# Altium PCB PCB1.PcbDoc
Units mm, origin at the board's own origin, x right, y up, seen from the top; angles counter-clockwise.
Board outline 100.25 x 54.84 mm, 2 copper layers (Top Layer, Bottom Layer); 13 components, 21 nets, 65 pads, 11 vias.
Unrouted connection lines stored in the file: 22.
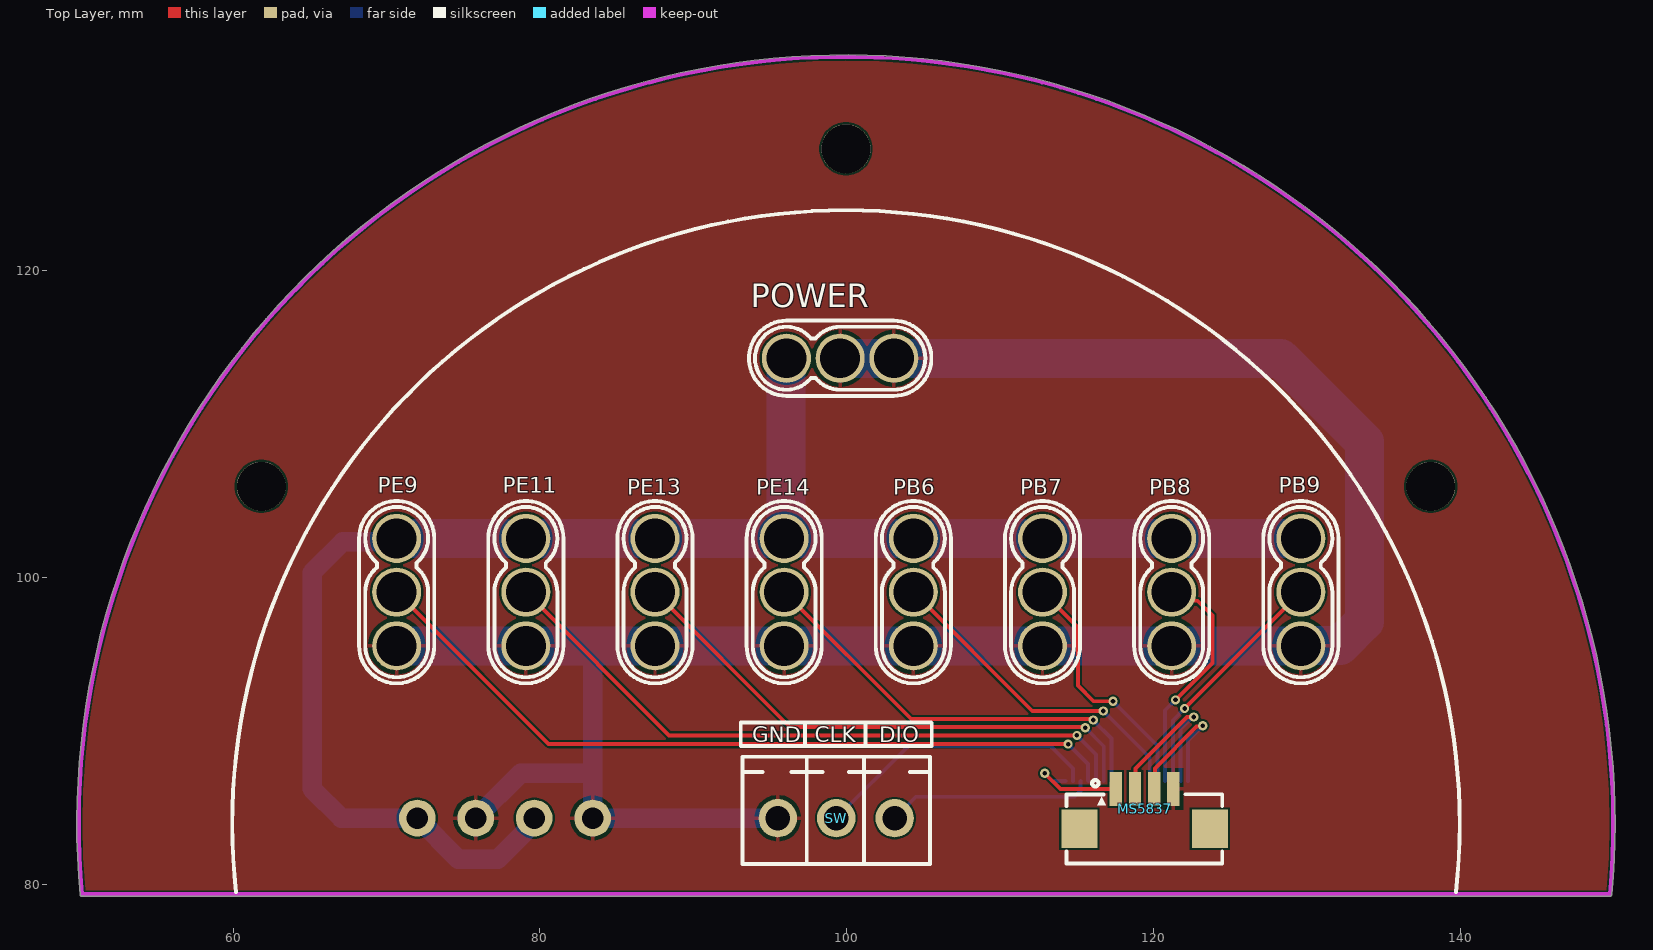
[diagram p0: Top Layer view]
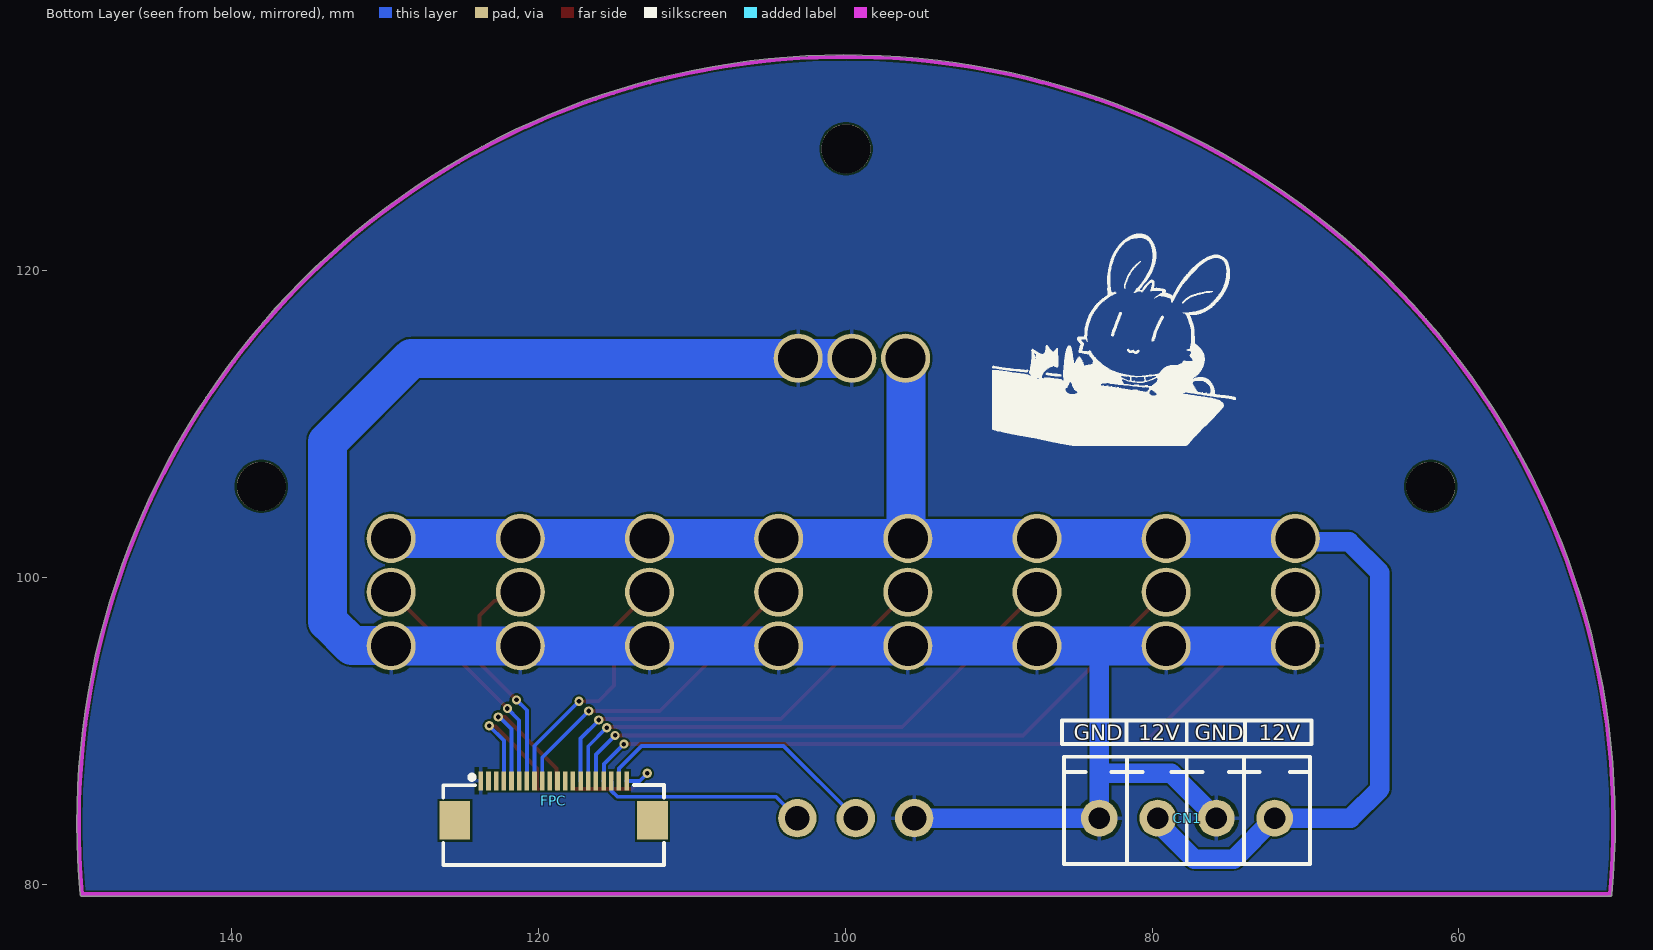
[diagram p1: Bottom Layer view, seen from below]

## Layer stack, top to bottom
Top Solder: solder mask 0.0102, Solder Resist, Dk 3.5
Top Layer: signal copper 0.0356
Dielectric 1: dielectric 0.32, FR-4, Dk 4.8
Bottom Layer: signal copper 0.0356
Bottom Solder: solder mask 0.0102, Solder Resist, Dk 3.5

## Board outline
50.033,79.351 ccw(c50.16,79.363) 50.232,79.258 ccw(c50.283,79.374) 50.283,79.247 149.739,79.247 ccw(c149.739,79.374) 149.866,79.363 ccw(c99.951,83.947) 150.076,83.947 ccw(c99.949,83.947)

## Design rules (kind name [scope] priority, off if disabled: settings)
Clearance [All] p1: gap=0.127 ignorepadtopadclearanceinfootprint=FALSE
PolygonConnect [All] p1: connectstyle=Relief reliefconductorwidth=0.254 reliefentries=4 polygonreliefangle="90 Angle" airgapwidth=0.254
RoutingVias [All] p1: holewidth=0.711 width=1.27 viastyle="Through Hole" minholewidth=0.711 minwidth=1.27 maxholewidth=0.711 maxwidth=1.27
SolderMaskExpansion [All] p1: expansion=0.102
Width [All] p1: maxlimit=2.54 minlimit=0.254 preferedwidth=1.524 bottomlayer_prefwidth=1.27 minimp=50.000000 maximp=50.000000 favimp=50.000000
30 further rules are at their usual default settings.

## Components (designator, comment, footprint, x,y, rotation, side; value= is the part's Value field where it differs from the comment)
CN1 "KF2EDGV-3.81-4P_C441334" CONN-TH_4P-P3.81_KF2EDGV-3.81-4P 77.724,84.328 r0 bottom
FPC "FPC-05F-20PH20" FPC-SMD_20P-P0.50_XUNPU_FPC-05F-20PH20 118.999,85.471 r180 bottom
MS5837 "HC-1.25-4PWT" CONN-SMD_4P-P1.25-HC-1.25-4PWT 119.41,84.933 r0 top
PB6 "MR30-M" CONN-TH_MR30-M 104.34,99.06 r270 top
PB7 "MR30-M" CONN-TH_MR30-M 112.758,99.06 r270 top
PB8 "MR30-M" CONN-TH_MR30-M 121.176,99.06 r270 top
PB9 "MR30-M" CONN-TH_MR30-M 129.594,99.06 r270 top
PE9 "MR30-M" CONN-TH_MR30-M 70.666,99.06 r270 top
PE11 "MR30-M" CONN-TH_MR30-M 79.085,99.06 r270 top
PE13 "MR30-M" CONN-TH_MR30-M 87.503,99.06 r270 top
PE14 "MR30-M" CONN-TH_MR30-M 95.921,99.06 r270 top
POWER "MR30-M" CONN-TH_MR30-M 99.568,114.3 r0 top
SW "KF2EDGV-3.81-3P" CONN-TH_3P-P3.81_KF2EDGV-3.81-3P 99.314,84.328 r180 top

## Footprints (in the part's own frame and the unit in brackets; to place one, negate y for a bottom-side part, rotate by r counter-clockwise, add the part's x,y. Pads: shape width x height; smd on the part's side, far side on the other; paste and mask are expansions set on the pad)
CONN-SMD_4P-P1.25-HC-1.25-4PWT [mm]
  rect 0.8x2.2 smd paste+0 mask+0.05: 1(-1.875,1.3) 2(-0.625,1.3) 3(0.625,1.3) 4(1.875,1.3)
  rect 2.35x2.5 smd paste+0 mask+0.05: 5(4.255,-1.3) 6(-4.255,-1.3)
  silkscreen extent -5.08,-3.55 5.06,1.88
CONN-TH_3P-P3.81_KF2EDGV-3.81-3P [mm]
  round 2.5 hole 1.6: 1(-3.81,0) 2(0,0) 3(3.81,0)
  silkscreen extent -6.11,-4 6.11,3
CONN-TH_4P-P3.81_KF2EDGV-3.81-4P [mm]
  round 2.4 hole 1.4: 1(-5.715,0) 2(-1.905,0) 3(1.905,0) 4(5.715,0)
  silkscreen extent -8.02,-4 8.02,3
CONN-TH_MR30-M [mm]
  round 3.2 hole 2.6 paste+0 mask+0.05: 1(-3.5,0) 2(0,0) 3(3.5,0)
  silkscreen extent -5.94,-2.45 5.94,2.45
FPC-SMD_20P-P0.50_XUNPU_FPC-05F-20PH20 [mm]
  rect 0.3x1.25 smd paste+0 mask+0.05: 1(-4.75,1.288) 2(-4.25,1.288) 3(-3.75,1.288) 4(-3.25,1.288) 5(-2.75,1.288) 6(-2.25,1.288) 7(-1.75,1.288) 8(-1.25,1.288) 9(-0.75,1.288) 10(-0.25,1.288) 11(0.25,1.288) 12(0.75,1.288) 13(1.25,1.288) 14(1.75,1.288) 15(2.25,1.288) 16(2.75,1.288) 17(3.25,1.288) 18(3.75,1.288) 19(4.25,1.288) 20(4.75,1.288)
  rect 2x2.5 smd paste+0 mask+0.05: 21(6.44,-1.287) 22(-6.44,-1.287)
  silkscreen extent -7.2,-4.19 7.2,1.67

## Part data
CN1: Color=绿色, Current Rating (Max)=8A, JLCPCB Part Class="Extended Part", LCSC Part Name="板端/插座-闭口 3.81mm 排数:1 每排P数:4 直针", Manufacturer=KEFA(科发), Manufacturer Part=KF2EDGV-3.81-4P, Operating Temperature Range=-40℃~+105℃, Voltage Rating (Max)=300V, Add into BOM=yes, Connector Type=板端/插座-闭口, Convert to PCB=yes, Datasheet=https://atta.szlcsc.com/upload/public/pdf/source/20191023/C441334_2B3686AE66497D0AF2D450E865A6AACE.pdf, Device=KF2EDGV-3.81-4P_C441334, Mounting Style=直针, Name=KF2EDGV-3.81-4P, Number of PINs Per Row=4, Number of Rows=1, Pitch=3.81mm, Supplier=LCSC, Supplier Footprint=直插,P=3.81mm, Supplier Part=C441334, Symbol=KF2EDGV-3.81-4P, Wire Gauge - AWG=-, Wire Gauge - mm?=-
FPC: JLCPCB Part Class="Extended Part", LCSC Part Name="20P 0.5mm", Manufacturer=XUNPU(讯普), Add into BOM=yes, Convert to PCB=yes, Device=FPC-05F-20PH20, Manufacturer Part=FPC-05F-20PH20, Name=FPC-05F-20PH20, Supplier=LCSC, Supplier Footprint=SMD, Supplier Part=C2856803, Symbol=FPC-05F-20PH20
MS5837: Current Rating (Max)=1A, JLCPCB Part Class="Extended Part", LCSC Part Name="1.25mm 1x4P 卧贴", Manufacturer=HCTL(华灿天禄), Operating Temperature Range=-25℃~+85℃, Add into BOM=yes, Convert to PCB=yes, Datasheet=https://atta.szlcsc.com/upload/public/pdf/source/20210728/C2845379_48B7DC28A4B35DB030A7253F7C3FD974.pdf, Device=HC-1.25-4PWT, Gender=公型插针, Manufacturer Part=HC-1.25-4PWT, Mounting Style=卧贴, Name=HC-1.25-4PWT, Number of PINs Per Row=4, Number of Rows=1, Pins Structure=1x4P, Pitch=1.25mm, Reference Series=-, Row Spacing=-, Supplier=LCSC, Supplier Footprint=SMD,P=1.25mm, Supplier Part=C2845381, Symbol=HC-1.25-4PWT
PB6 PB7 PB8 PB9 PE9 PE11 PE13 PE14 POWER: JLCPCB Part Class="Extended Part", LCSC Part Name="AMASS(艾迈斯)锂电池三芯电源连接器公头MR30-M 2件套", Manufacturer=AMASS(艾迈斯), Add into BOM=yes, Convert to PCB=yes, Datasheet=https://atta.szlcsc.com/upload/public/pdf/source/20170412/1491969315720.pdf, Device=MR30-M, Manufacturer Part=MR30-M, Name=MR30-M, Supplier=LCSC, Supplier Footprint=-, Supplier Part=C99873, Symbol=MR30-M
SW: Color=绿色, Current Rating (Max)=8A, JLCPCB Part Class="Extended Part", LCSC Part Name="板端/插座-闭口 3.81mm 排数:1 每排P数:3 直针", Manufacturer=KEFA(科发), Operating Temperature Range=-40℃~+105℃, Voltage Rating (Max)=300V, Add into BOM=yes, Connector Type=板端/插座-闭口, Convert to PCB=yes, Datasheet=https://atta.szlcsc.com/upload/public/pdf/source/20191023/C441333_64A45A3FA7EEF66FCEFDF359E788B867.pdf, Device=KF2EDGV-3.81-3P, Manufacturer Part=KF2EDGV-3.81-3P, Mounting Style=直针, Name=KF2EDGV-3.81-3P, Number of PINs Per Row=3, Number of Rows=1, Pitch=3.81mm, Supplier=LCSC, Supplier Footprint=直插,P=3.81mm, Supplier Part=C441333, Symbol=KF2EDGV-3.81-3P, Wire Gauge - AWG=-, Wire Gauge - mm?=-

## Free pads (board coordinates)
  round 3.2 hole 3.2: 1(138.054,105.947) 2(99.949,127.947) 3(61.844,105.947)

## Via types
v1: diameter 0.6, hole 0.3, Top Layer to Bottom Layer, 11 vias

## Nets (pads, with @x,y where several pads share a name; then routed paths per layer and width w, separated by ;. In a path a pad name is that pad's centre, name@x,y a point inside that pad or via, vN(x,y) a via of type N, cw(c..) or ccw(c..) an arc to the next point about the centre after c; other vN are vias at no path point)
5V: FPC.20 MS5837.1 | length 6.6
  Top Layer w0.254: v1(112.903,87.249) 113.919,86.233 MS5837.1
  Bottom Layer w0.254: v1(112.903,87.249) 113.393,86.759 FPC.20
12V: CN1.1 CN1.3 PB6.1 PB7.1 PB8.1 PB9.1 PE9.1 PE11.1 PE13.1 PE14.1 POWER.1 | length 108.7
  Bottom Layer w1.27: PE9.1 70.447,102.34 67.161,102.34 65.151,100.33 65.151,86.233 67.056,84.328 CN1.1 74.676,81.661 77.268,81.661 79.629,84.022 CN1.3
  Bottom Layer w2.54: PE9.1 PE11.1 PE13.1 PE14.1 PB6.1 PB7.1 PB8.1 PB9.1 ; PE14.1@96.033,102.671 POWER.1@96.033,114.265
GND: CN1.2 CN1.4 FPC.1 MS5837.4 PB6.3 PB7.3 PB8.3 PB9.3 PE9.3 PE11.3 PE13.3 PE14.3 POWER.2 POWER.3 SW.3 | length 144
  Bottom Layer w1.27: CN1.2 78.74,87.249 83.439,87.249 ; 83.439,95.56 83.439,87.249 ; SW.3 CN1.4 83.439,87.249
  Bottom Layer w2.54: PE9.3 PE11.3 83.439,95.56 PE13.3 PE14.3 PB6.3 PB7.3 PB8.3 PB9.3 129.609,95.575 132.151,95.575 133.731,97.155 133.731,108.839 128.27,114.3 POWER.3 POWER.2
PA13: FPC.18 SW.1 | length 13.5
  Bottom Layer w0.254: SW.1 104.521,85.725 114.85,85.725 115.226,86.101 115.226,86.736 FPC.18
PA14: FPC.19 SW.2 | length 18.8
  Bottom Layer w0.254: SW.2 104.013,89.027 113.284,89.027 114.748,87.563 114.748,86.76 FPC.19
PB0: FPC.11
PB1: FPC.10
PB4: FPC.13
PB5: FPC.12
PB6: FPC.9 PB6.2 | length 22.1
  Top Layer w0.254: PB6.2@105.029,99.06 PB6.2 112.086,91.313 v1(116.713,91.313)
  Bottom Layer w0.254: v1(116.713,91.313) 119.749,88.277 FPC.9
PB7: FPC.8 PB7.2 | length 16.1
  Top Layer w0.254: PB7.2 115.062,96.756 115.062,92.964 116.078,91.948 v1(117.348,91.948)
  Bottom Layer w0.254: v1(117.348,91.948) 120.249,89.047 FPC.8
PB8: FPC.7 PB8.2 | length 15.3
  Top Layer w0.254: PB8.2 121.74,98.496 122.865,98.496 123.825,97.536 123.825,94.439 v1(121.423,92.036)
  Bottom Layer w0.254: FPC.7 120.749,91.363 v1(121.423,92.036)
PB9: FPC.6 PB9.2 | length 15.8
  Top Layer w0.254: v1(122.016,91.476) 122.016,91.479 129.594,99.057 PB9.2
  Bottom Layer w0.254: FPC.6 121.249,90.708 v1(122.016,91.476)
PC6: FPC.5 MS5837.2 | length 11.1
  Top Layer w0.254: MS5837.2 118.807,86.255 118.807,87.565 122.174,90.932 122.605,90.932 v1(122.616,90.921)
  Bottom Layer w0.254: FPC.5 121.749,90.126 122.544,90.921 v1(122.616,90.921)
PC7: FPC.4 MS5837.3 | length 9.6
  Top Layer w0.254: MS5837.3 120.077,86.275 120.077,87.565 122.805,90.293 123.151,90.293 v1(123.206,90.348)
  Bottom Layer w0.254: FPC.4 122.249,89.391 v1(123.206,90.348)
PC8: FPC.3
PC9: FPC.2
PE9: FPC.17 PE9.2 | length 51.1
  Top Layer w0.254: PE9.2@71.002,99.06 PE9.2 80.572,89.154 v1(114.427,89.154)
  Bottom Layer w0.254: v1(114.427,89.154) 115.726,87.855 115.726,86.782 FPC.17
PE11: FPC.16 PE11.2 | length 43.3
  Top Layer w0.254: PE11.2 88.421,89.723 v1(114.995,89.723)
  Bottom Layer w0.254: v1(114.995,89.723) 115.001,89.723 116.249,88.475 FPC.16
PE13: FPC.15 PE13.2 | length 35.7
  Top Layer w0.254: PE13.2 96.285,90.277 115.487,90.277 v1(115.54,90.224)
  Bottom Layer w0.254: v1(115.54,90.224) 116.749,89.015 FPC.15
PE14: FPC.14 PE14.2 | length 28.3
  Top Layer w0.254: PE14.2@95.921,99.333 PE14.2 104.203,90.778 116.014,90.778 v1(116.066,90.726)
  Bottom Layer w0.254: v1(116.066,90.726) 116.066,90.69 117.249,89.507 FPC.14
pads on no net: FPC.21 FPC.22 MS5837.5 MS5837.6

## Polygon pours and split planes (outlines as drawn)
GND on Bottom Solder "NONET_L-01_P-001" (solid): 100.584,115.57 100.584,113.03 102.235,113.03 102.235,115.57
GND on Bottom Solder "NONET_L-01_P-001" (solid): 104.14,115.57 104.14,113.03 127.762,113.03 132.461,108.331 132.461,97.663 131.699,96.901 130.556,96.901 130.556,94.361 132.715,94.361 135.001,96.647 135.001,109.347 128.778,115.57 127.508,115.57
GND on Bottom Solder "NONET_L-01_P-001" (solid): 71.369,96.778 71.369,94.294 128.646,94.294 128.646,96.834
12V on Bottom Solder "NONET_L-01_P-001" (solid): 71.628,103.83 71.628,101.346 128.905,101.346 128.905,103.886
12V on Bottom Solder "NONET_L-01_P-001" (solid): 94.742,113.411 94.742,103.759 97.282,103.759 97.282,113.411
GND on Bottom Layer "GND_L02_P001" (solid, remove dead copper, pour order 1): 46.101,137.668 153.289,137.668 153.289,73.66 46.355,73.66
GND on Top Layer "GND_L01_P000" (solid, remove dead copper, pour order 0): 46.101,137.668 153.162,137.668 153.162,73.66 46.355,73.66

## Keep-outs
Keep-Out Layer:
  lines w0.254: 50.16,79.363 cw(c99.949,83.947) 149.739,79.374 50.16,79.374

## Silkscreen, mask and mechanical layers (free items; w line width, h text height)
Top Overlay:
  lines w0.254: 60.197,79.502 cw(c99.949,83.947) 139.703,79.516 ; 93.091,89.017 93.091,90.551 105.41,90.551 105.508,90.551 105.537,90.522 105.537,89.027 93.158,89.027 ; 97.282,89.027 97.282,90.551 ; 101.219,89.154 101.219,90.551
  text "GND" at 93.853,89.281 h1.02
  text "CLK" at 97.925,89.284 h1.02
  text "DIO" at 102.108,89.281 h1.02
Bottom Overlay:
  drawing of 16 lines, arcs and shapes, not listed
  text "12V" at 73.044,89.412 h1.02
  text "GND" at 77.216,89.408 h1.02
  text "12V" at 80.899,89.408 h1.02
  text "GND" at 85.109,89.412 h1.02
Mechanical 1:
  lines w0.254: 60.197,79.502 cw(c99.949,83.947) 139.701,79.502